# Altium PCB PumpDriver.PcbDoc
Units mil, origin at the board's own origin, x right, y up, seen from the top; angles counter-clockwise.
Board outline 2125 x 2500 mil, 2 copper layers (Top Layer, Bottom Layer); 18 components, 9 nets, 37 pads, 5 vias.
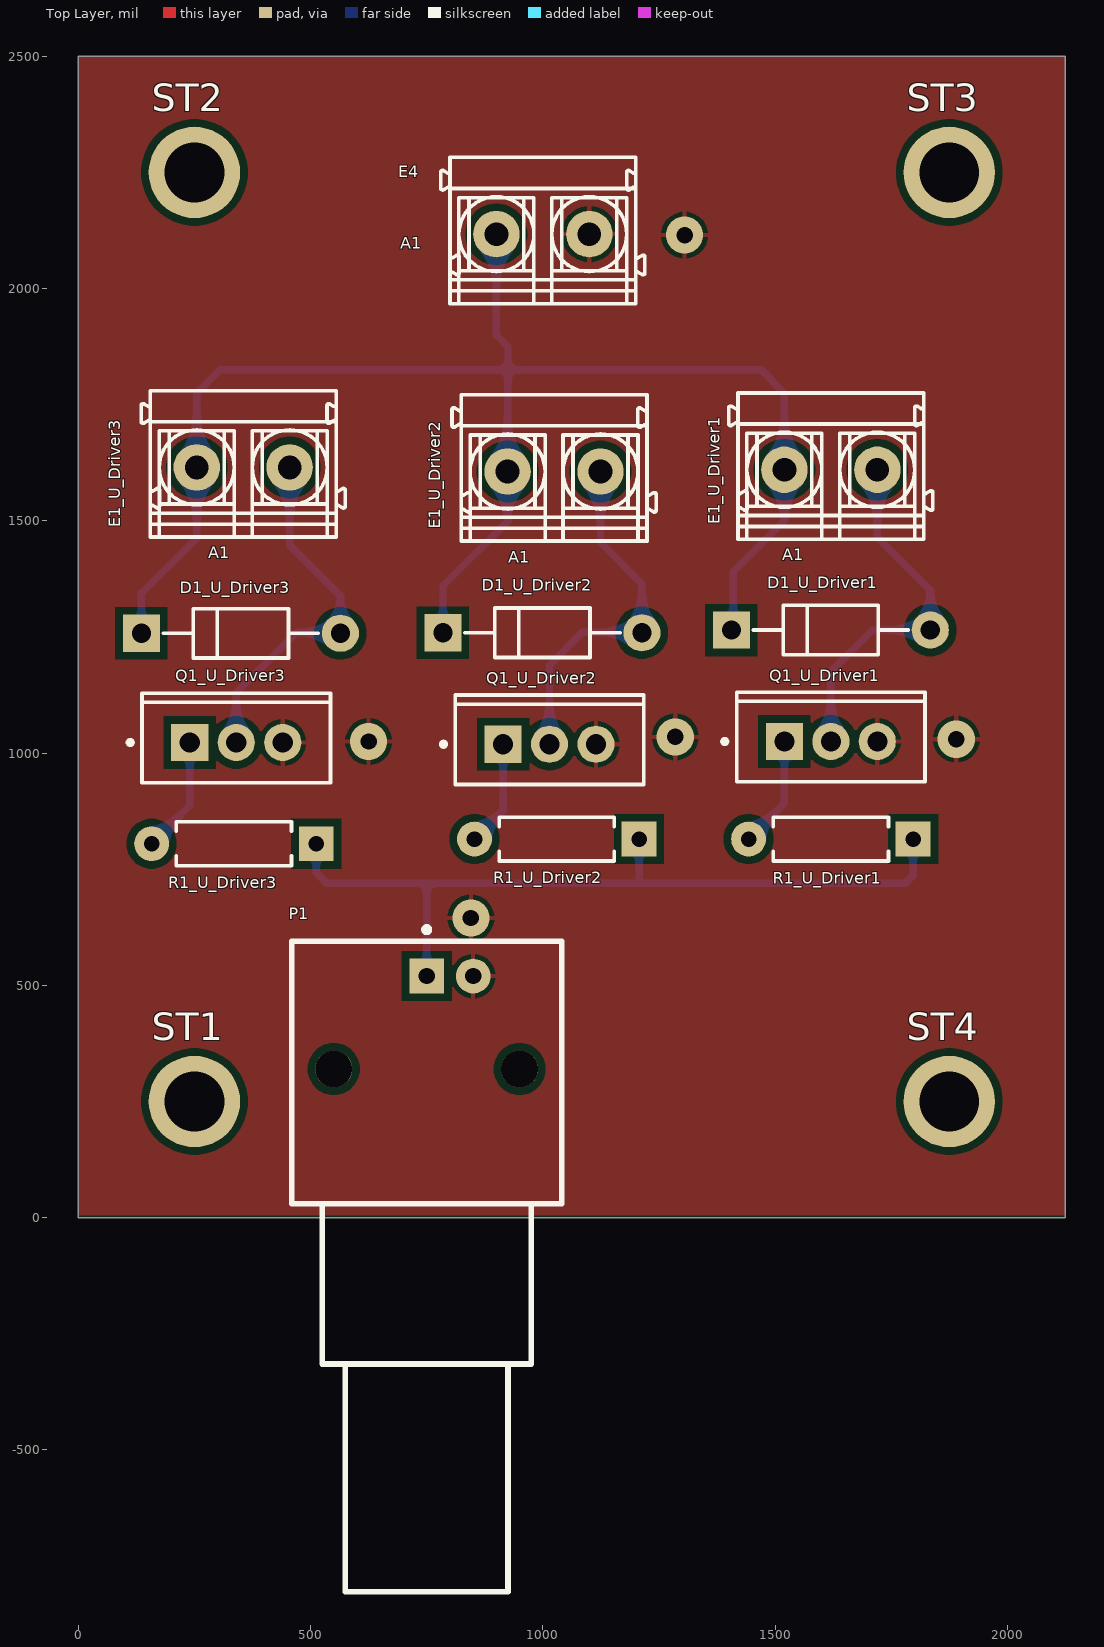
[diagram p0: Top Layer view]
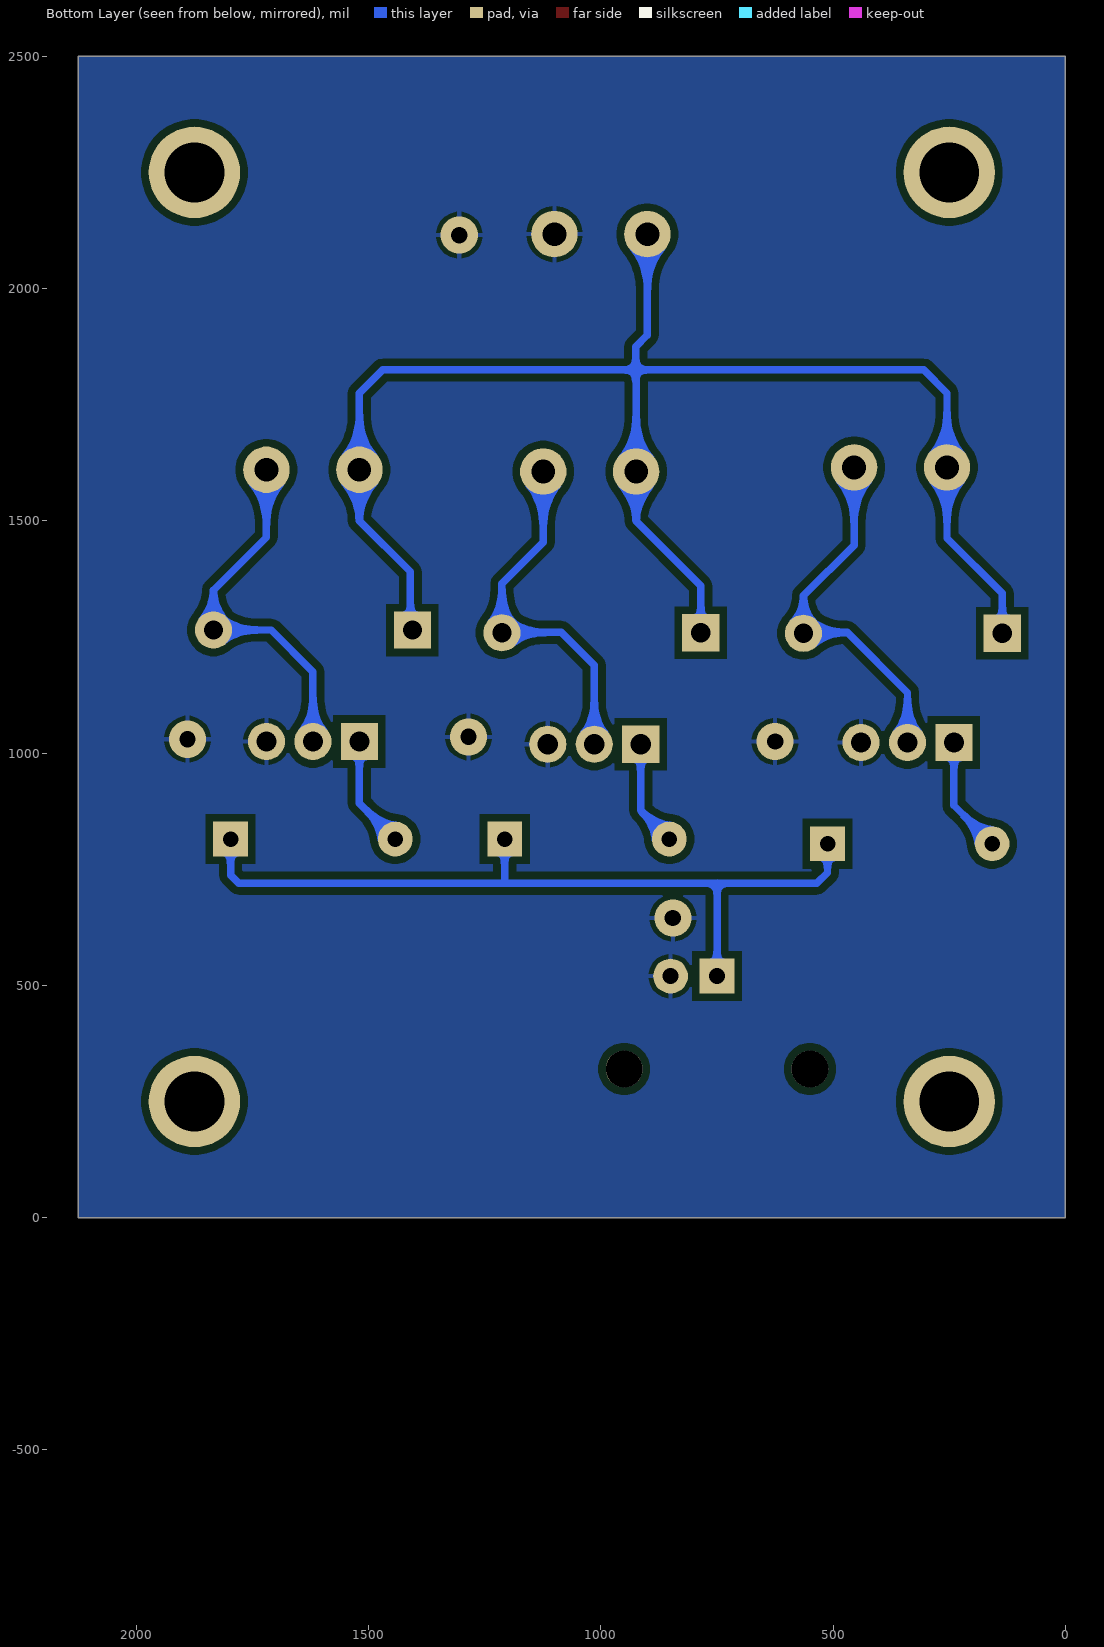
[diagram p1: Bottom Layer view, seen from below]
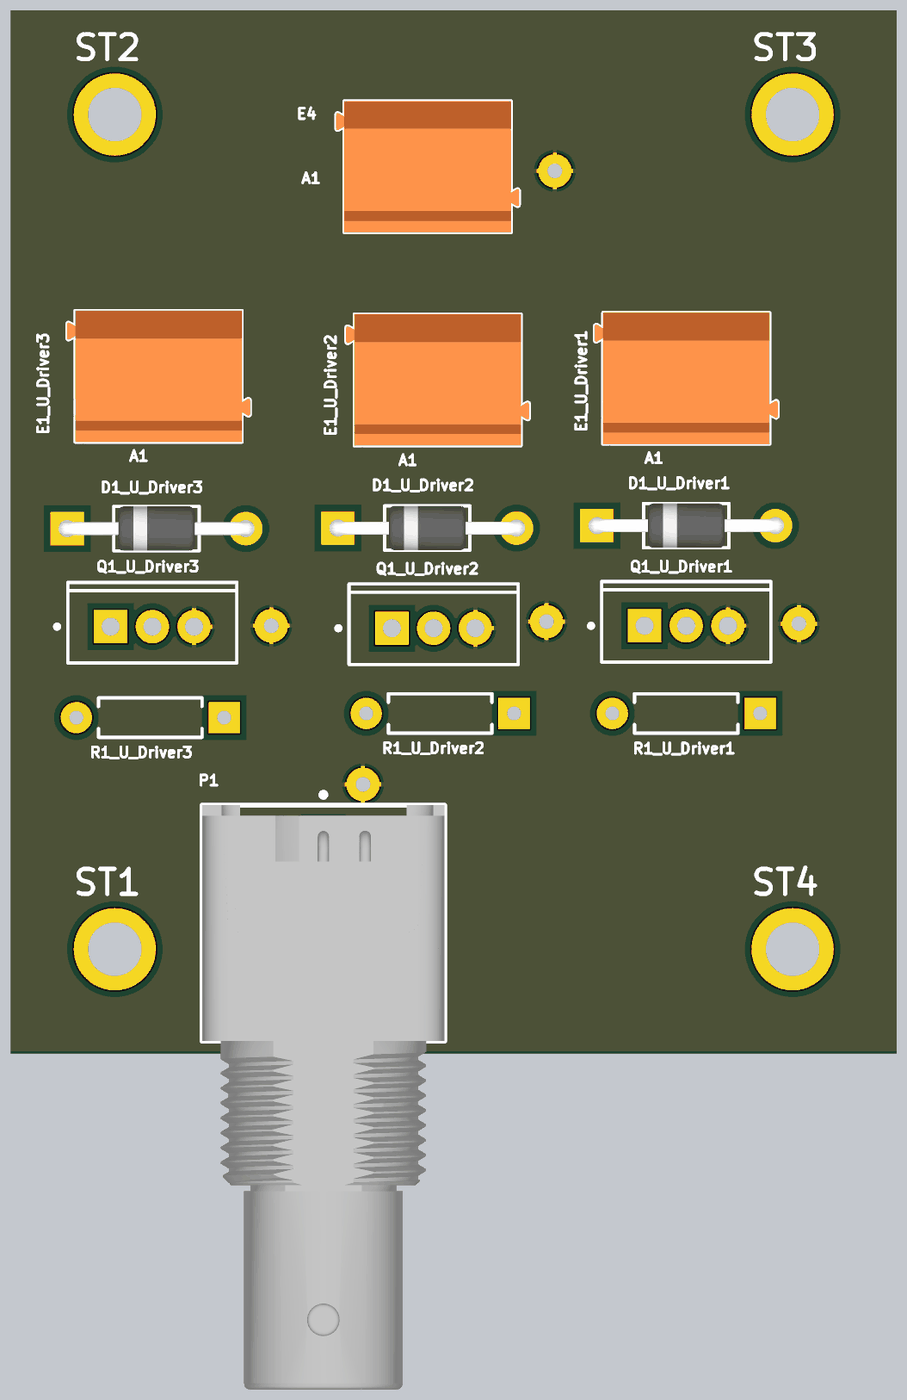
[diagram p2: 3D render of the assembled board from above, using the file's embedded part models]

## Layer stack, top to bottom
Top Solder: solder mask 0.4, Solder Resist, Dk 3.5
Top Layer: signal copper 1.4
Dielectric 1: dielectric 12.6, FR-4, Dk 4.8
Bottom Layer: signal copper 1.4
Bottom Solder: solder mask 0.4, Solder Resist, Dk 3.5

## Board outline
0,0 2125,0 2125,2500 0,2500

## Design rules (kind name [scope] priority, off if disabled: settings)
Clearance [All] p1: gap=12 ignorepadtopadclearanceinfootprint=FALSE except(0: SMDPad-Hole THPad-Hole Via-Hole Fill-Hole Poly-Hole Region-Hole Text-Hole; 16: Arc-Fill Arc-Poly Arc-Region Track-Fill Track-Poly Track-Region SMDPad-Fill SMDPad-Poly SMDPad-Region THPad-Fill THPad-Poly THPad-Region Via-Fill Via-Poly Via-Region Fill-Fill Fill-Poly Fill-Region Poly-Poly Poly-Region Region-Region)
MinimumAnnularRing [(HasFootprint('TE_227161-1') AND IsPad)] p1: minimumring=10
PolygonConnect [All] p1: connectstyle=Relief reliefconductorwidth=10 reliefentries=4 polygonreliefangle="90 Angle" airgapwidth=10
RoutingVias [All] p1: holewidth=28 width=50 viastyle="Through Hole" minholewidth=28 minwidth=50 maxholewidth=28 maxwidth=50
SolderMaskExpansion [All] p1: expansion=4 istentingtop=FALSE
Width [All] p1: maxlimit=24 minlimit=8 preferedwidth=16 minimp=50.000000 maximp=50.000000 favimp=50.000000
30 further rules are at their usual default settings.

## Classes and differential pairs
component class U_Driver3: D1_U_Driver3 E1_U_Driver3 Q1_U_Driver3 R1_U_Driver3
channel class Driver: U_Driver1 U_Driver2
component class U_Driver1: D1_U_Driver1 E1_U_Driver1 Q1_U_Driver1 R1_U_Driver1
component class U_Driver2: D1_U_Driver2 E1_U_Driver2 Q1_U_Driver2 R1_U_Driver2
component class PumpDriver: E4 P1 ST1 ST2 ST3 ST4

## Components (designator, comment, footprint, x,y, rotation, side; value= is the part's Value field where it differs from the comment)
D1_U_Driver1 "1N4007-E3/54" FP-1N4007-MFG 1620,1265 r0 top value=15pF (schematic designator D1)
D1_U_Driver2 "1N4007-E3/54" FP-1N4007-MFG 999.09,1259.09 r0 top value=15pF (schematic designator D1)
D1_U_Driver3 "1N4007-E3/54" FP-1N4007-MFG 350,1257.87 r0 top value=15pF (schematic designator D1)
E1_U_Driver1 "Term" PM_5_08_90_02 1620,1617.87 r0 top (schematic designator E1)
E1_U_Driver2 "Term" PM_5_08_90_02 1024.09,1614.09 r0 top (schematic designator E1)
E1_U_Driver3 "Term" PM_5_08_90_02 355,1622.87 r0 top (schematic designator E1)
E4 "Term" PM_5_08_90_02 1000,2125 r0 top
P1 "BNC" TE_227161-1 750,520 r180 top
Q1_U_Driver1 "MJE3055T" ONSC-TO-220-3-221A-09 1620,1025 r90 top (schematic designator Q1)
Q1_U_Driver2 "MJE3055T" ONSC-TO-220-3-221A-09 1014.33,1019.09 r90 top (schematic designator Q1)
Q1_U_Driver3 "MJE3055T" ONSC-TO-220-3-221A-09 340,1022.87 r90 top (schematic designator Q1)
R1_U_Driver1 "10" RESA60-630X240 1620,815 r180 top value=4.75k (schematic designator R1)
R1_U_Driver2 "10" RESA60-630X240 1030,815 r180 top value=4.75k (schematic designator R1)
R1_U_Driver3 "10" RESA60-630X240 335,805 r180 top value=4.75k (schematic designator R1)
ST1 "PTH-M2D5X5" PTH-M2D5X5 250,250 r0 top
ST2 "PTH-M2D5X5" PTH-M2D5X5 250,2250 r0 top
ST3 "PTH-M2D5X5" PTH-M2D5X5 1875,2250 r0 top
ST4 "PTH-M2D5X5" PTH-M2D5X5 1875,250 r0 top

## Footprints (in the part's own frame and the unit in brackets; to place one, negate y for a bottom-side part, rotate by r counter-clockwise, add the part's x,y. Pads: shape width x height; smd on the part's side, far side on the other; paste and mask are expansions set on the pad)
FP-1N4007-MFG [mil]
  rect 80x80 hole 41.34 paste-39370.1 mask+0: 1(-214.09,0)
  round 80 hole 41.34 paste-39370.1 mask+0: 2(214.09,0)
  silkscreen extent -167,-53 167,53, body extent -250,-57 250,57, height 10
ONSC-TO-220-3-221A-09 [mil] "FM, 3-Leads, Body 10.3x4.85mm, Pitch 2.54mm"
  rect 80x80 hole 43.31: 1(0,100)
  round 80 hole 43.31: 2(0,0) 3(0,-100)
  silkscreen extent -87,-203 106,233, body extent -86,-203 105,203, height 781
PM_5_08_90_02 [mm] "PM 5.08/02/90 3.5"
  round 2.54 hole 1.3: A1(-2.54,-0.2) A2(2.54,-0.2)
  silkscreen extent -5.58,-4 5.58,4, body extent -5.58,-4 5.58,4, height 10.01
PTH-M2D5X5 [mm]
  round 5 hole 3.264: 1(0,0)
RESA60-630X240 [mm] "Axial Resistor, 2-Leads, Dia 2.4mm, Body Length 6.3mm"
  rect 1.905x1.905 hole 0.85: 1(-4.5,0)
  round 1.905 hole 0.85: 2(4.5,0)
  silkscreen extent -3.15,-1.2 3.15,1.2, body extent -4.78,-1.2 4.78,1.2, height 2.4
TE_227161-1 [mm]
  rect 1.905x1.905 hole 0.89: 1(0,0)
  round 1.905 hole 0.89: 2(-2.54,0)
  round 2.01 hole 2.01 unplated: ""(-5.08,5.08)
  round 2.01 / inner round 0 / far side round 2.01 hole 2.01 unplated: ""(5.08,5.08)
  silkscreen extent -7.38,-2.69 7.38,33.66, body extent -7.38,-1.91 7.38,33.66, height 15.95

## Part data
D1_U_Driver1 D1_U_Driver2 D1_U_Driver3: library part CMP-02540-000046-1, "DIODE GEN PURP 1KV 1A DO204AL", Capacitance=15pF, Forward Current=1A, Manufacturer=Vishay, Max Junction Temp=+150°C, Max Repetitive Reverse Voltage=1000V, Max Surge Forward Current=30A, Package=1N4007, Peak Reverse Current=30uA, Temperature="-50°C to +150°C", Temperature Range Low=-50°C, Automotive=No, Category=Diode, ComponentLink2Description=Datasheet, ComponentLink2URL=http://www.vishay.com/docs/88503/1n4001.pdf, Device Class L1="Discrete Semiconductors", Device Class L2=Diodes, Device Class L3="Rectifier Diodes", Digikey Description="DIODE GEN PURP 1KV 1A DO204AL", Height=2.7mm, Ipc Land Pattern Name=DIOPA1088W105L520D270, Lead Free=Yes, Manufacturer Part Number=1N4007-E3/54, Mouser Description="Rectifiers Vr/1000V Io/1A", Octopart=https://octopart.com/1n4007-e3%2F54-vishay-39548207, RoHS=TRUE, Temperature Range High=+150°C
E1_U_Driver1 E1_U_Driver2 E1_U_Driver3 E4: library part CMP-1559-01627-1, "OMNIMATE Signal - series PM", Colour=Orange, Manufacturer=Weidmueller, PartNumber=1760490000, Rated_current_use_group_B_UL_1059="15 A", Rated_voltage_for_surge_voltage_class_pollution_degree_II_2="600 V", Rated_voltage_use_group_B_UL_1059="300 V", UL_94_flammability_rating=V-0, ComponentLink1Description="Manufacturer URL", ComponentLink1URL=http://www.weidmueller.com/, ComponentLink2Description="URL Link1", ComponentLink2URL=http://catalog.weidmueller.com/catalog/Start.do?localeId=en&ObjectID=1760490000, Contact_material=Cu-Leg, Contact_surface=tinned, Insulating_material="Wemid (PA)", Mounting_onto_the_PCB="Solder connection", No_of_poles=2, PackageReference=PM_5_08_90_02, Packaging=Box, Pitch_inch="0,2 inch", Pitch_mm="5,08 mm", Qty="500 PCS", Revision=V1, Short_text_for_material="PM 5.08/02/90 3.5SN OR BX", Side_termination_characteristic="closed side", Solder_pin_length_mm="3,5 mm", Solid_max_H05_07_V_U="2,5 mm²", Solid_min_H05_07_V_U="0,13 mm²", Wire_cross_section_AWG_max_UL_1059="AWG 14", Wire_cross_section_AWG_min_UL_1059="AWG 26"
P1: "BNC Elbow Connector", LatestRevisionDate=17-Jul-2002, LatestRevisionNote="Re-released for DXP Platform.", Publisher="Altium Limited"
Q1_U_Driver1 Q1_U_Driver2 Q1_U_Driver3: library part CMP-1048-01152-1, "Complementary Silicon Plastic Power Transistor, 3-Pin TO-220, Tube", Manufacturer="On Semiconductor", ComponentLink1Description="Manufacturer URL", ComponentLink1URL=http://www.onsemi.com/, ComponentLink2Description=Datasheet, ComponentLink2URL=http://www.onsemi.com/pub_link/Collateral/MJE2955T-D.PDF, ComponentLink3Description="Package Specification", ComponentLink3URL=http://www.onsemi.com/pub_link/Collateral/221A-09.PDF, DatasheetVersion="Rev. 11", fT Min (MHz)=2, IC Continuous (A)=10, Mounting Technology="Through Hole", PackageDescription="3-Pin Flange Mount, Vertical Straight Lead, Body 9.97 x 4.445 mm, Pitch 2.54 mm", PackageReference=TO-220-3-221A-09, PackageVersion="Rev. AG, 09/2011", Packing=Tube, PartNumber=MJE3055T, Polarity=NPN, RoHS=FALSE
R1_U_Driver1 R1_U_Driver2 R1_U_Driver3: library part CMP-009-00059-4, "Axial, 10ohm, 0.5W", Case/Package=Axial, Manufacturer=Yageo, Max Operating Temperature=155°C, Min Operating Temperature=-55°C, Package Description="2-Pin Axial Lead, Dia 2.4 mm, Body Length 6.3 mm", Package Quantity=200, Package Reference=MFR-25, Power=250mW, Tolerance=1%, Voltage Rating=250V, Composition=MetalFilm, Datasheet URL=http://www.yageo.com/documents/recent/Yageo%20LR_MFR_2013.pdf, Datasheet Version=Apr-13, Manufacturer URL=http://www.yageo.com/, Mounting Technology=TH, Packaging=Bulk, RoHS Compliant=True
ST1 ST2 ST3 ST4: library part CMP-00028-00004-2, "M2 PTH (2.5mm), 5mm pad", Pins=1

## Via types
v1: diameter 80, hole 35.4, Top Layer to Bottom Layer, 5 vias

## Nets (pads, with @x,y where several pads share a name; then routed paths per layer and width w, separated by ;. In a path a pad name is that pad's centre, name@x,y a point inside that pad or via, vN(x,y) a via of type N, cw(c..) or ccw(c..) an arc to the next point about the centre after c; other vN are vias at no path point)
GND: E4.A2 P1.2 Q1_U_Driver1.3 Q1_U_Driver2.3 Q1_U_Driver3.3
  other v1: 845,645 625,1025 1890,1030 1285,1035 1305,2115
NetD1_U_Driver1_1: D1_U_Driver1.1 D1_U_Driver2.1 D1_U_Driver3.1 E1_U_Driver1.A1 E1_U_Driver2.A1 E1_U_Driver3.A1 E4.A1 | length 3356.5
  Bottom Layer w16: D1_U_Driver3.1 135.91,1343.78 255,1462.87 E1_U_Driver3.A1 255,1775 305,1825 925,1825 ; D1_U_Driver2.1 785,1360 924.09,1499.09 E1_U_Driver2.A1 924.09,1800 925,1800.91 925,1825 ; E4.A1 900,1900 925,1875 925,1825 ; D1_U_Driver1.1 1410,1269.09 1410,1390 1520,1500 E1_U_Driver1.A1 1520,1775 1470,1825 925,1825
NetD1_U_Driver1_2: D1_U_Driver1.2 E1_U_Driver1.A2 Q1_U_Driver1.2 | length 793.6
  Bottom Layer w16: Q1_U_Driver1.2 1620,1175 1710,1265 D1_U_Driver1.2 1834.09,1350.91 1720,1465 E1_U_Driver1.A2
NetD1_U_Driver2_2: D1_U_Driver2.2 E1_U_Driver2.A2 Q1_U_Driver2.2 | length 782.8
  Bottom Layer w16: Q1_U_Driver2.2 1014.33,1189.33 1085,1260 1212.28,1260 D1_U_Driver2.2 1213.19,1365 1124.09,1454.09 E1_U_Driver2.A2
NetD1_U_Driver3_2: D1_U_Driver3.2 E1_U_Driver3.A2 Q1_U_Driver3.2 | length 788.3
  Bottom Layer w16: Q1_U_Driver3.2 340,1130 470,1260 561.97,1260 D1_U_Driver3.2 564.09,1338.78 455,1447.87 E1_U_Driver3.A2
NetP1_1: P1.1 R1_U_Driver1.1 R1_U_Driver2.1 R1_U_Driver3.1 | length 1737.5
  Bottom Layer w16: R1_U_Driver3.1 512.17,742.83 535,720 750,720 ; P1.1 750,720 ; R1_U_Driver2.1 1207.17,722.17 1205,720 ; R1_U_Driver1.1 1797.17,737.17 1780,720 1205,720 ; 750,720 1205,720
NetQ1_U_Driver1_1: Q1_U_Driver1.1 R1_U_Driver1.2 | length 249
  Bottom Layer w16: R1_U_Driver1.2 1520,892.17 Q1_U_Driver1.1 Q1_U_Driver1.1@1525,1020
NetQ1_U_Driver2_1: Q1_U_Driver2.1 R1_U_Driver2.2 | length 229.6
  Bottom Layer w16: R1_U_Driver2.2 914.33,876.5 Q1_U_Driver2.1
NetQ1_U_Driver3_1: Q1_U_Driver3.1 R1_U_Driver3.2 | length 251.9
  Bottom Layer w16: R1_U_Driver3.2 240,887.17 Q1_U_Driver3.1
pads on no net: P1. ST1.1 ST2.1 ST3.1 ST4.1

## Polygon pours and split planes (outlines as drawn)
GND on Top Layer "GND_L01_P001" (solid, pour order 1): 0,5 0,2500 2125,2500 2125,5 2445,5
GND on Bottom Layer "GND_L02_P002" (solid, remove dead copper, pour order 2): 0,0 0,2500 2125,2500 2125,0

## Silkscreen, mask and mechanical layers (free items; w line width, h text height)
Mechanical 1:
  the board outline again, w0

## Text inside footprints (layer, text, board x,y; h text height)
E1_U_Driver1: Top Overlay "A1" at 1515,1415 h25
E1_U_Driver2: Top Overlay "A1" at 925,1410 h25
E1_U_Driver3: Top Overlay "A1" at 280,1420 h25
E4: Top Overlay "A1" at 692.84,2085.83 h25
P1: Top Assembly "PCB EDGE" at 907.54,-318.9 h25 r180